# Altium PCB SiPM_Array_v3.2.PcbDoc
Units mm, origin at the board's own origin, x right, y up, seen from the top; angles counter-clockwise.
Board outline 25 x 28.2 mm, 2 copper layers (Top Layer, Bottom Layer); 17 components, 7 nets, 81 pads, 31 vias.
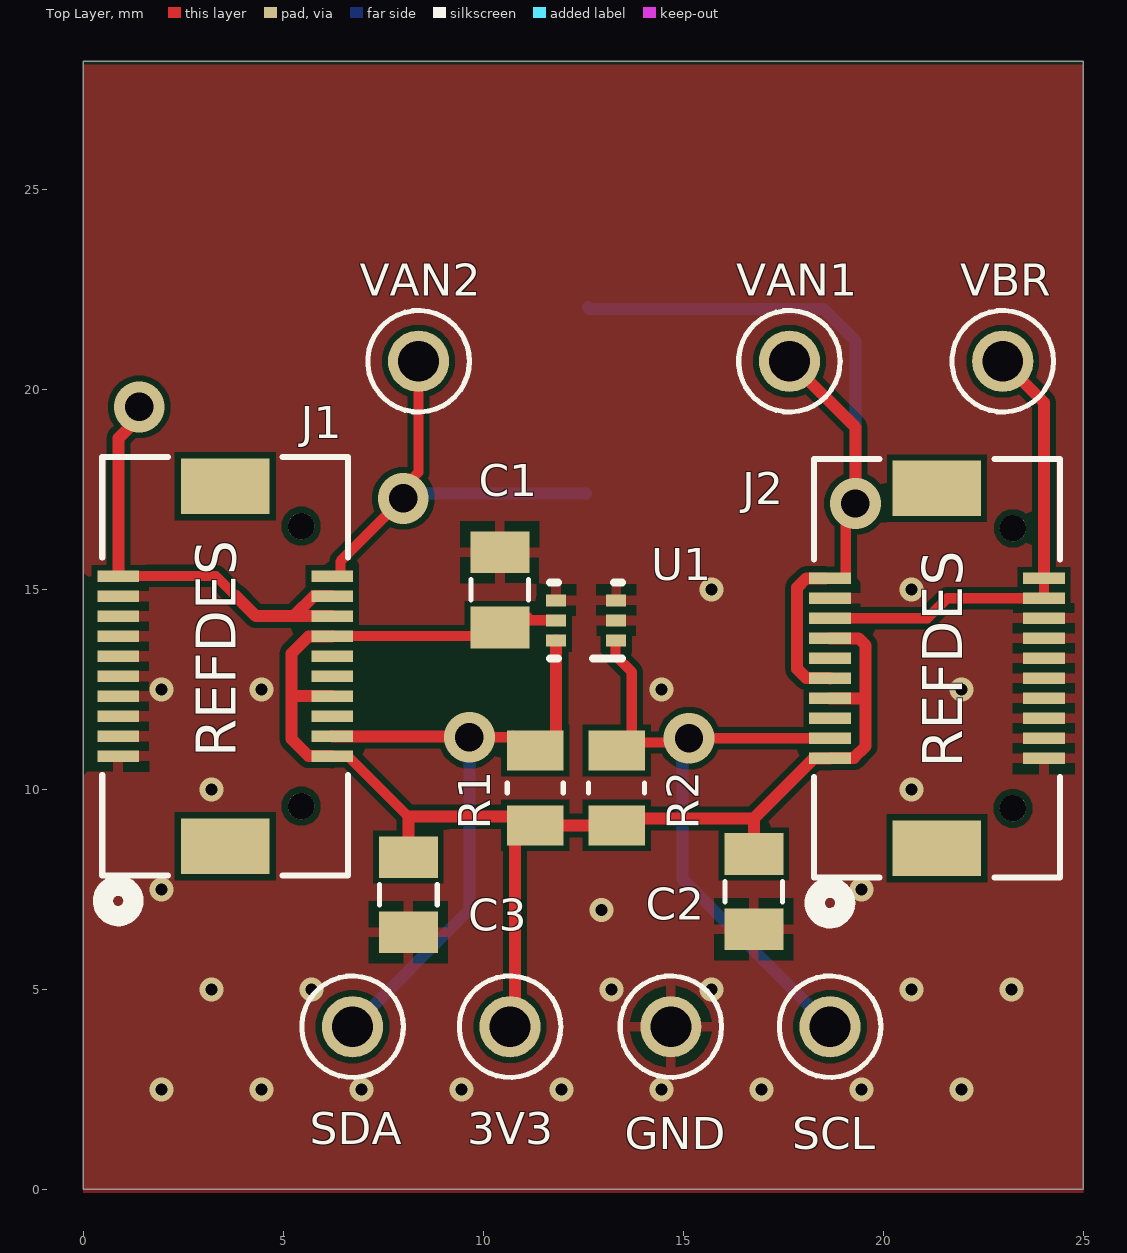
[diagram p0: Top Layer view]
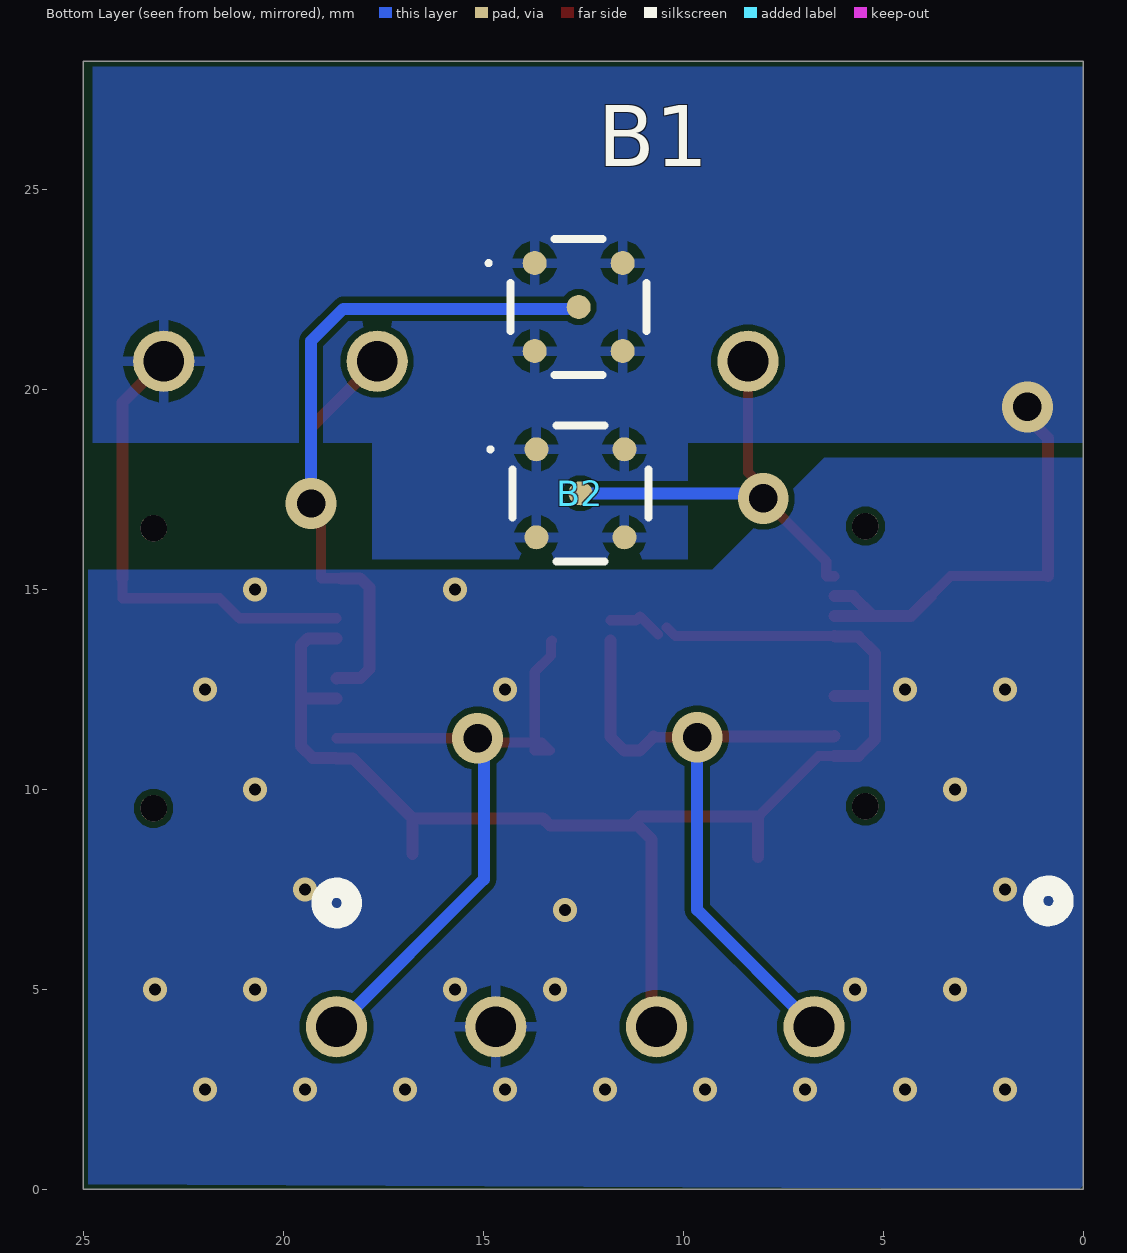
[diagram p1: Bottom Layer view, seen from below]
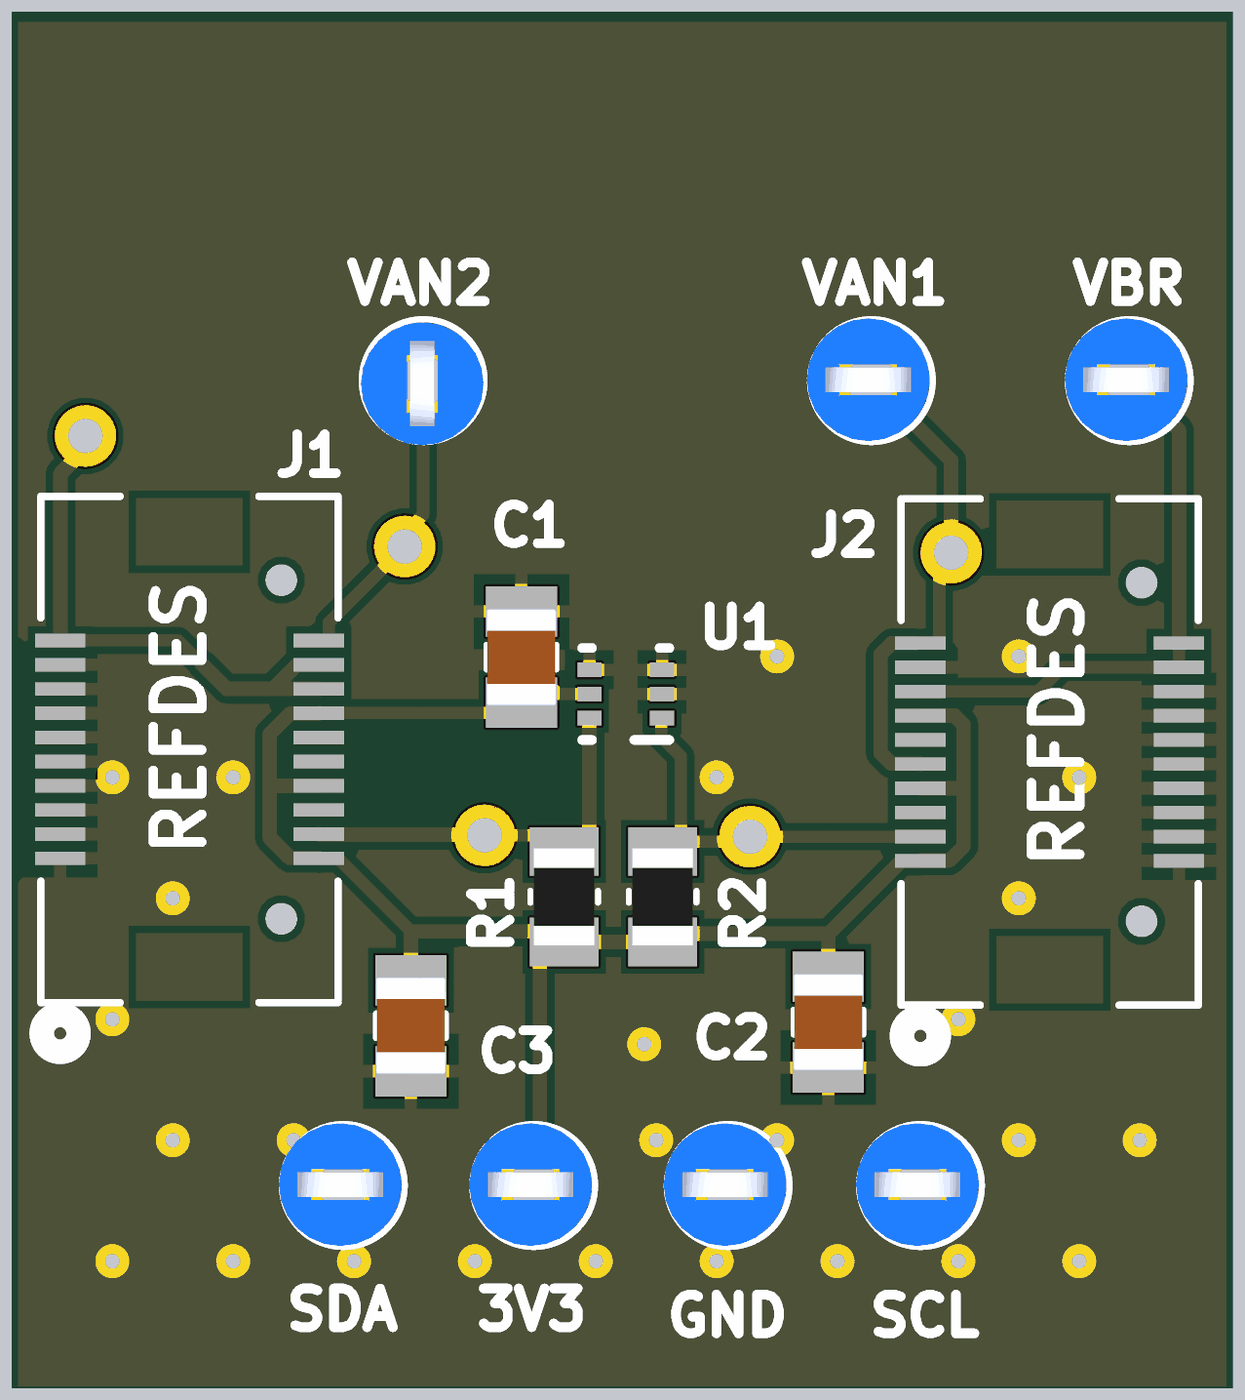
[diagram p2: 3D render of the assembled board from above, using the file's embedded part models]

## Layer stack, top to bottom
Top Solder: solder mask 0.0102, Solder Resist, Dk 3.5
Top Layer: signal copper 0.0356
Dielectric 1: dielectric 0.32, FR-4, Dk 4.8
Bottom Layer: signal copper 0.0356
Bottom Solder: solder mask 0.0102, Solder Resist, Dk 3.5

## Board outline
0,0 25,0 25,28.2 0,28.2

## Design rules (kind name [scope] priority, off if disabled: settings)
Clearance [All] p1: gap=0.152 ignorepadtopadclearanceinfootprint=FALSE
HoleSize [All] p1: absolutevalues=TRUE maxlimit=6.2 minlimit=0.3 maxpercent=80.000 minpercent=20.000
MinimumAnnularRing [All] p1: minimumring=0.15
MinimumSolderMaskSliver [All] p1: minsoldermaskwidth=0.1
PolygonConnect ViaConnect [IsVia] p1: connectstyle=Direct reliefconductorwidth=0.254 reliefentries=4 polygonreliefangle="90 Angle" airgapwidth=0.254
PolygonConnect [All] p2: connectstyle=Relief reliefconductorwidth=0.254 reliefentries=4 polygonreliefangle="90 Angle" airgapwidth=0.254
RoutingVias [All] p1: holewidth=0.3 width=0.6 viastyle="Through Hole" minholewidth=0.3 minwidth=0.5 maxholewidth=1 maxwidth=5
SilkToSilkClearance [All] p1: silktosilkclearance=0.1
SilkToSolderMaskClearance [IsPad] p1: minsilkscreentomaskgap=0.1 clearancetoexposedcopper=TRUE
SolderMaskExpansion [All] p1: expansion=0.051 istentingtop=FALSE
SupplyNets "Schematic Supply Nets_6" [InNet('GND')] p1: voltage=0.000
SupplyNets "Schematic Supply Nets_5" [InNet('3V3')] p2: voltage=0.000
SupplyNets "Schematic Supply Nets_4" [InNet('VBR')] p3: voltage=0.000
SupplyNets "Schematic Supply Nets_3" [InNet('SCL')] p4: voltage=0.000
SupplyNets "Schematic Supply Nets_2" [InNet('VAN1')] p5: voltage=0.000
SupplyNets "Schematic Supply Nets_1" [InNet('VAN2')] p6: voltage=0.000
SupplyNets "Schematic Supply Nets" [InNet('SDA')] p7: voltage=0.000
Width [All] p1: maxlimit=25.4 minlimit=0.15 preferedwidth=0.3
26 further rules are at their usual default settings.

## Components (designator, comment, footprint, x,y, rotation, side; value= is the part's Value field where it differs from the comment)
3V3 "5267" KEYSTONE_5267 10.668,4.064 r0 top
B1 "S14160-3050HS" S141603050HS 12.616,22.055 r180 bottom
B2 "S14160-3050HS" S141603050HS 12.573,17.399 r180 bottom
C1 "100uF" CAPACITOR_0805_2012M-70N 10.414,14.986 r270 top
C2 "100uF" CAPACITOR_0805_2012M-70N 16.764,7.442 r90 top
C3 "100uF" CAPACITOR_0805_2012M-70N 8.128,7.366 r90 top
GND "5267" KEYSTONE_5267 14.69,4.064 r0 top
J1 "DF17(3.0)-20DS-0.5V(57)" CONN_DF173.0-20DS-0.5V57_HIR 3.548,13.077 r90 top
J2 "DF17(3.0)-20DS-0.5V(57)" CONN_DF173.0-20DS-0.5V57_HIR 21.341,13.025 r90 top
R1 "CR0805-FX-2001ELF" RESC2012X60N 11.299,10.033 r90 top
R2 "CR0805-FX-2001ELF" RESC2012X60N 13.335,10.033 r90 top
SCL "5267" KEYSTONE_5267 18.669,4.064 r0 top
SDA "5267" KEYSTONE_5267 6.731,4.064 r0 top
U1 "TMP112AQDRLRQ1" DRL0006A 12.573,14.224 r180 top
VAN1 "5267" KEYSTONE_5267 17.653,20.701 r0 top
VAN2 "5267" KEYSTONE_5267 8.382,20.701 r90 top
VBR "5267" KEYSTONE_5267 22.987,20.701 r0 top

## Footprints (in the part's own frame and the unit in brackets; to place one, negate y for a bottom-side part, rotate by r counter-clockwise, add the part's x,y. Pads: shape width x height; smd on the part's side, far side on the other; paste and mask are expansions set on the pad)
CAPACITOR_0805_2012M-70N [mm] "Capacitor, 0805 (2012 metric), 0.7mm high, nominal pads,"
  rect 1.04x1.47 smd mask+0.051: 1(-0.94,0) 2(0.94,0)
  silkscreen extent -0.25,-0.72 0.25,0.72, body extent -1,-0.73 1,0.73, height 1.23
CONN_DF173.0-20DS-0.5V57_HIR [mil]
  rect 11x41 smd paste+0 mask+0: 1(-88.58,105.31) 2(-88.58,-105.31) 3(-68.9,105.31) 4(-68.9,-105.31) 5(-49.21,105.31) 6(-49.21,-105.31) 7(-29.53,105.31) 8(-29.53,-105.31) 9(-9.84,105.31) 10(-9.84,-105.31) 11(9.84,105.31) 12(9.84,-105.31) 13(29.53,105.31) 14(29.53,-105.31) 15(49.21,105.31) 16(49.21,-105.31) 17(68.9,105.31) 18(68.9,-105.31) 19(88.58,105.31) 20(88.58,-105.31)
  rect 55x87 smd paste-43.5 mask-43.5: 21(-177.17,0) 22(177.17,0)
  round 26 / inner round 60 / far side round 26 hole 26 unplated paste-99999 mask+0: 23(-137.8,-74.8) 24(137.8,-74.8)
  silkscreen extent -246,-121 206,121
DRL0006A [mm]
  rect 0.5x0.3 smd paste+0 mask+0.051: 1(-0.75,0.5) 2(-0.75,0) 4(0.75,-0.5) 5(0.75,0) 6(0.75,0.5)
  rect 0.5x0.3 smd paste+0 mask+0.05: 3(-0.75,-0.5)
  silkscreen extent -0.9,-0.95 0.9,0.95
KEYSTONE_5267 [mm]
  round 1.53 hole 1.02: TP(0,0)
  silkscreen extent -1.27,-1.27 1.27,1.27, body extent -1.33,-1.24 1.2,1.29, height 3.17
RESC2012X60N [mm]
  rect 1x1.42 smd: 1(-0.935,0) 2(0.935,0)
  silkscreen extent -0.12,-0.7 0.12,0.7, body extent -1,-0.63 1,0.63, height 0.6
S141603050HS [mm]
  round 0.6 smd: A1(-1.1,1.1) A3(-1.1,-1.1) B2(0,0) C1(1.1,1.1) C3(1.1,-1.1)
  silkscreen extent -2.3,-1.7 1.7,1.7

## Part data
3V3 GND SCL SDA VAN1 VAN2 VBR: "TEST POINT (BLUE) - MINIATURE", Package=None, Check_prices=https://www.snapeda.com/parts/5267/Keystone/view-part/?ref=eda, MF="Keystone Electronics", MP=5267, SnapEDA_Link=https://www.snapeda.com/parts/5267/Keystone/view-part/?ref=snap
B1 B2: "The S14160 series achieve higher PDE (photon detection efficiency) and lower operation voltage than other MPPC to adapt for PET and radiation monitor application.-Higher PDE: 50% at p, Vop=VBR + 2.7 V", Manufacturer_Name=Hamamatsu, Datasheet Link=https://www.hamamatsu.com/content/dam/hamamatsu-photonics/sites/documents/99_SALES_LIBRARY/ssd/s14160_s14161_series_kapd1064e.pdf, Geometry.Height=1.55mm, Manufacturer_Part_Number=S14160-3050HS
C1 C2 C3: library part GRM21BR60J107ME15L, "Passive - Capacitor, 0805, 100uF Max, X5R, 6.3V ±20%, -55°C ~ 85°C, 0805 (2012 Metric). 20uF @ 6.3V", Capacitance at Rated Voltage=20%, Package=0805, Rated Voltage=6.3V, Supplier 1 Part No.=490-GRM155R61E225KE11JCT-ND, Temp Range="-55°C ~ 85°C", Temperature Coefficient=X5R, Tolerance=±20%, APSS Standard Part="APSS Standard", MF Part No.=GRM21BR60J107ME15L, Supplier 1=Digikey
J1 J2: library part DF173.0-20DS-0.5V57, "Description", Manufacturer_Name=Hirose, Copyright="Copyright (C) 2025 Ultra Librarian. All rights reserved.", Manufacturer_Part_Number=DF17(3.0)-20DS-0.5V(57), RefDes=RefDes, Type=Type
R1 R2: "Res 0805 2k 1% 125mW", Package="0805 Bourns", Check_prices=https://www.snapeda.com/parts/CR0805-FX-2001ELF/Bourns/view-part/?ref=eda, MF=Bourns, MP=CR0805-FX-2001ELF, SnapEDA_Link=https://www.snapeda.com/parts/CR0805-FX-2001ELF/Bourns/view-part/?ref=snap
U1: "No Description Available", Manufacturer="Texas Instruments", CompType=IC, Mfr_Name="Texas Instruments", MountType=SMT, PackageReference=DRL0006A, PartNumber=TMP112AQDRLRQ1, RefDes=RefDes, RoHS=Y, Type=TYPE

## Via types
v1: diameter 0.6, hole 0.3, Top Layer to Bottom Layer, 26 vias
v2: diameter 1.27, hole 0.711, Top Layer to Bottom Layer, 5 vias

## Nets (pads, with @x,y where several pads share a name; then routed paths per layer and width w, separated by ;. In a path a pad name is that pad's centre, name@x,y a point inside that pad or via, vN(x,y) a via of type N, cw(c..) or ccw(c..) an arc to the next point about the centre after c; other vN are vias at no path point)
3V3: 3V3.TP C1.2 C2.2 C3.2 J1.2 J1.8 J1.14 J2.1 J2.7 J2.13 R1.1 R2.1 U1.5 | length 37.8
  Top Layer w0.254: J1.2@6.231,10.831 6.612,10.831 8.124,9.319 ; J1.14@6.231,13.831 10.199,13.831 C1.2 ; C1.2@10.629,13.868 11.083,14.322 11.179,14.227 11.82,14.227 U1.5
  Top Layer w0.3: J1.2 6.213,10.837 5.625,10.837 5.207,11.255 5.207,12.327 ; J1.8 5.207,12.327 ; J1.14 6.213,13.817 5.625,13.817 5.207,13.399 5.207,12.327 ; 8.124,9.319 8.128,9.315 ; C3.2 8.128,9.315 ; 3V3.TP 10.795,4.191 10.795,8.748 11.145,9.098 R1.1 ; C2.2 16.764,9.271 ; J2.7 19.494,12.275 19.558,12.339 ; J2.13 19.382,13.775 19.558,13.599 19.558,12.339 ; 8.128,9.315 11.082,9.315 R1.1 ; R1.1 R2.1 13.508,9.271 16.764,9.271 ; 16.764,9.271 18.268,10.775 J2.1 18.676,10.785 19.264,10.785 19.558,11.079 19.558,12.339
GND: C1.1 C2.1 C3.1 GND.TP J1.1 J1.3 J1.5 J1.7 J1.9 J1.11 J1.13 J1.15 J1.17 J2.2 J2.4 J2.6 J2.8 J2.10 J2.12 J2.14 J2.16 J2.17 U1.2 U1.3 U1.4
  other v1: 1.952,2.5 4.452,2.5 6.952,2.5 9.452,2.5 11.952,2.5 14.452,2.5 16.952,2.5 19.452,2.5 21.952,2.5 3.202,5 5.702,5 13.202,5 15.702,5 20.702,5 23.202,5 12.954,6.985 1.952,7.5 19.452,7.5 3.202,10 20.702,10 1.952,12.5 4.452,12.5 14.452,12.5 21.952,12.5 15.702,15 20.702,15
SCL: J2.3 R2.2 SCL.TP U1.1 | length 17.6
  Top Layer w0.254: U1.1@13.28,13.724 13.283,13.724 13.306,13.701 13.306,13.342 13.712,12.935 R2.2@13.712,11.17 ; J2.3 v2(15.142,11.275) 15.037,11.17 R2.2@13.712,11.17 ; R2.2@13.712,11.17 13.537,11.17 R2.2 13.712,10.968 R2.2@13.712,11.17
  Bottom Layer w0.3: v2(15.142,11.275) 14.986,11.119 14.986,7.747 SCL.TP
SDA: J1.4 R1.2 SDA.TP U1.6 | length 16.8
  Top Layer w0.254: v2(9.652,11.303) 10.716,11.303 10.73,11.317 R1.2@10.73,11.327
  Top Layer w0.3: J1.4 6.233,11.317 9.638,11.317 v2(9.652,11.303) ; R1.2@10.739,11.318 11.089,10.968 11.473,10.968 11.823,11.318 U1.6
  Bottom Layer w0.3: SDA.TP 9.652,6.985 v2(9.652,11.303)
VAN1: B1.B2 J2.9 J2.19 VAN1.TP | length 21.7
  Top Layer w0.254: J2.19 18.555,15.275 19.047,15.275 19.06,15.288 19.06,16.626 19.304,16.87 v2(19.304,17.145)
  Top Layer w0.3: VAN1.TP 19.304,19.05 v2(19.304,17.145) ; J2.19@18.555,15.275 18.078,15.275 17.843,15.04 17.843,13.01 18.068,12.785 18.656,12.785 J2.9
  Bottom Layer w0.3: B1.B2 12.658,22.013 18.5,22.013 19.304,21.209 v2(19.304,17.145)
VAN2: B2.B2 J1.20 VAN2.TP | length 11
  Top Layer w0.254: J1.20 6.415,15.327 6.428,15.34 6.428,15.699 v2(8.001,17.272) 8.001,17.547 8.382,17.928 VAN2.TP
  Bottom Layer w0.3: v2(8.001,17.272) 8.128,17.399 B2.B2
VBR: B1.A1 B1.A3 B1.C1 B1.C3 B2.A1 B2.A3 B2.C1 B2.C3 J1.16 J1.18 J1.19 J2.15 J2.18 J2.20 VBR.TP | length 23.3
  Top Layer w0.254: J1.19@0.881,15.331 3.312,15.331 3.812,14.831 ; J2.15 21.097,14.275 21.597,14.775 J2.18 J2.20
  Top Layer w0.3: J1.19@0.881,15.331 0.881,18.78 1.397,19.296 v2(1.397,19.558) ; 3.812,14.831 4.312,14.331 5.266,14.331 ; J1.16 6.219,14.331 5.266,14.331 ; J1.18 5.762,14.827 5.266,14.331 ; VBR.TP 24.016,19.672 J2.20
pads on no net: J1.6 J1.10 J1.12 J1.21 J1.22 J1.23 J1.24 J2.5 J2.11 J2.21 J2.22 J2.23 J2.24

## Polygon pours and split planes (outlines as drawn)
VBR on Bottom Layer "VBR_L02_P004" (solid, remove dead copper, pour order 4): 9.89,18.669 9.89,15.748 17.78,15.748 17.78,18.669 24.765,18.669 24.765,28.067 0,28.067 0,18.669 8.382,18.669
GND on Bottom Layer "GND_L02_P007" (solid, remove dead copper, pour order 7): 0,0 0,18.287 6.477,18.287 9.271,15.493 24.873,15.493 24.873,0.13
GND on Top Layer "GND_L01_P003" (solid, remove dead copper, pour order 3): 0,-0.086 0,28.114 25,28.114 25,-0.086

## Silkscreen, mask and mechanical layers (free items; w line width, h text height)
Board Shape (Mech5):
  the board outline again, w0.254

## Text inside footprints (layer, text, board x,y; h text height)
J1: Top Overlay "REFDES" at 3.81,10.795 h1 r90; Mechanical 13 "REFDES2" at 3.81,10.795 h1 r90
J2: Top Overlay "REFDES" at 21.971,10.541 h1 r90; Mechanical 13 "REFDES2" at 21.971,10.541 h1 r90